# Altium PCB RELIA.PcbDoc (part 2 of 3)
Units mm, origin at the board's own origin, x right, y up, seen from the top; angles counter-clockwise.
Board outline 64.01 x 60 mm, 4 copper layers (Top Layer, GND, POWER, Bottom Layer), stack 1.457 mm thick; 143 components, 99 nets, 570 pads, 325 vias.
Unrouted connection lines stored in the file: 1.
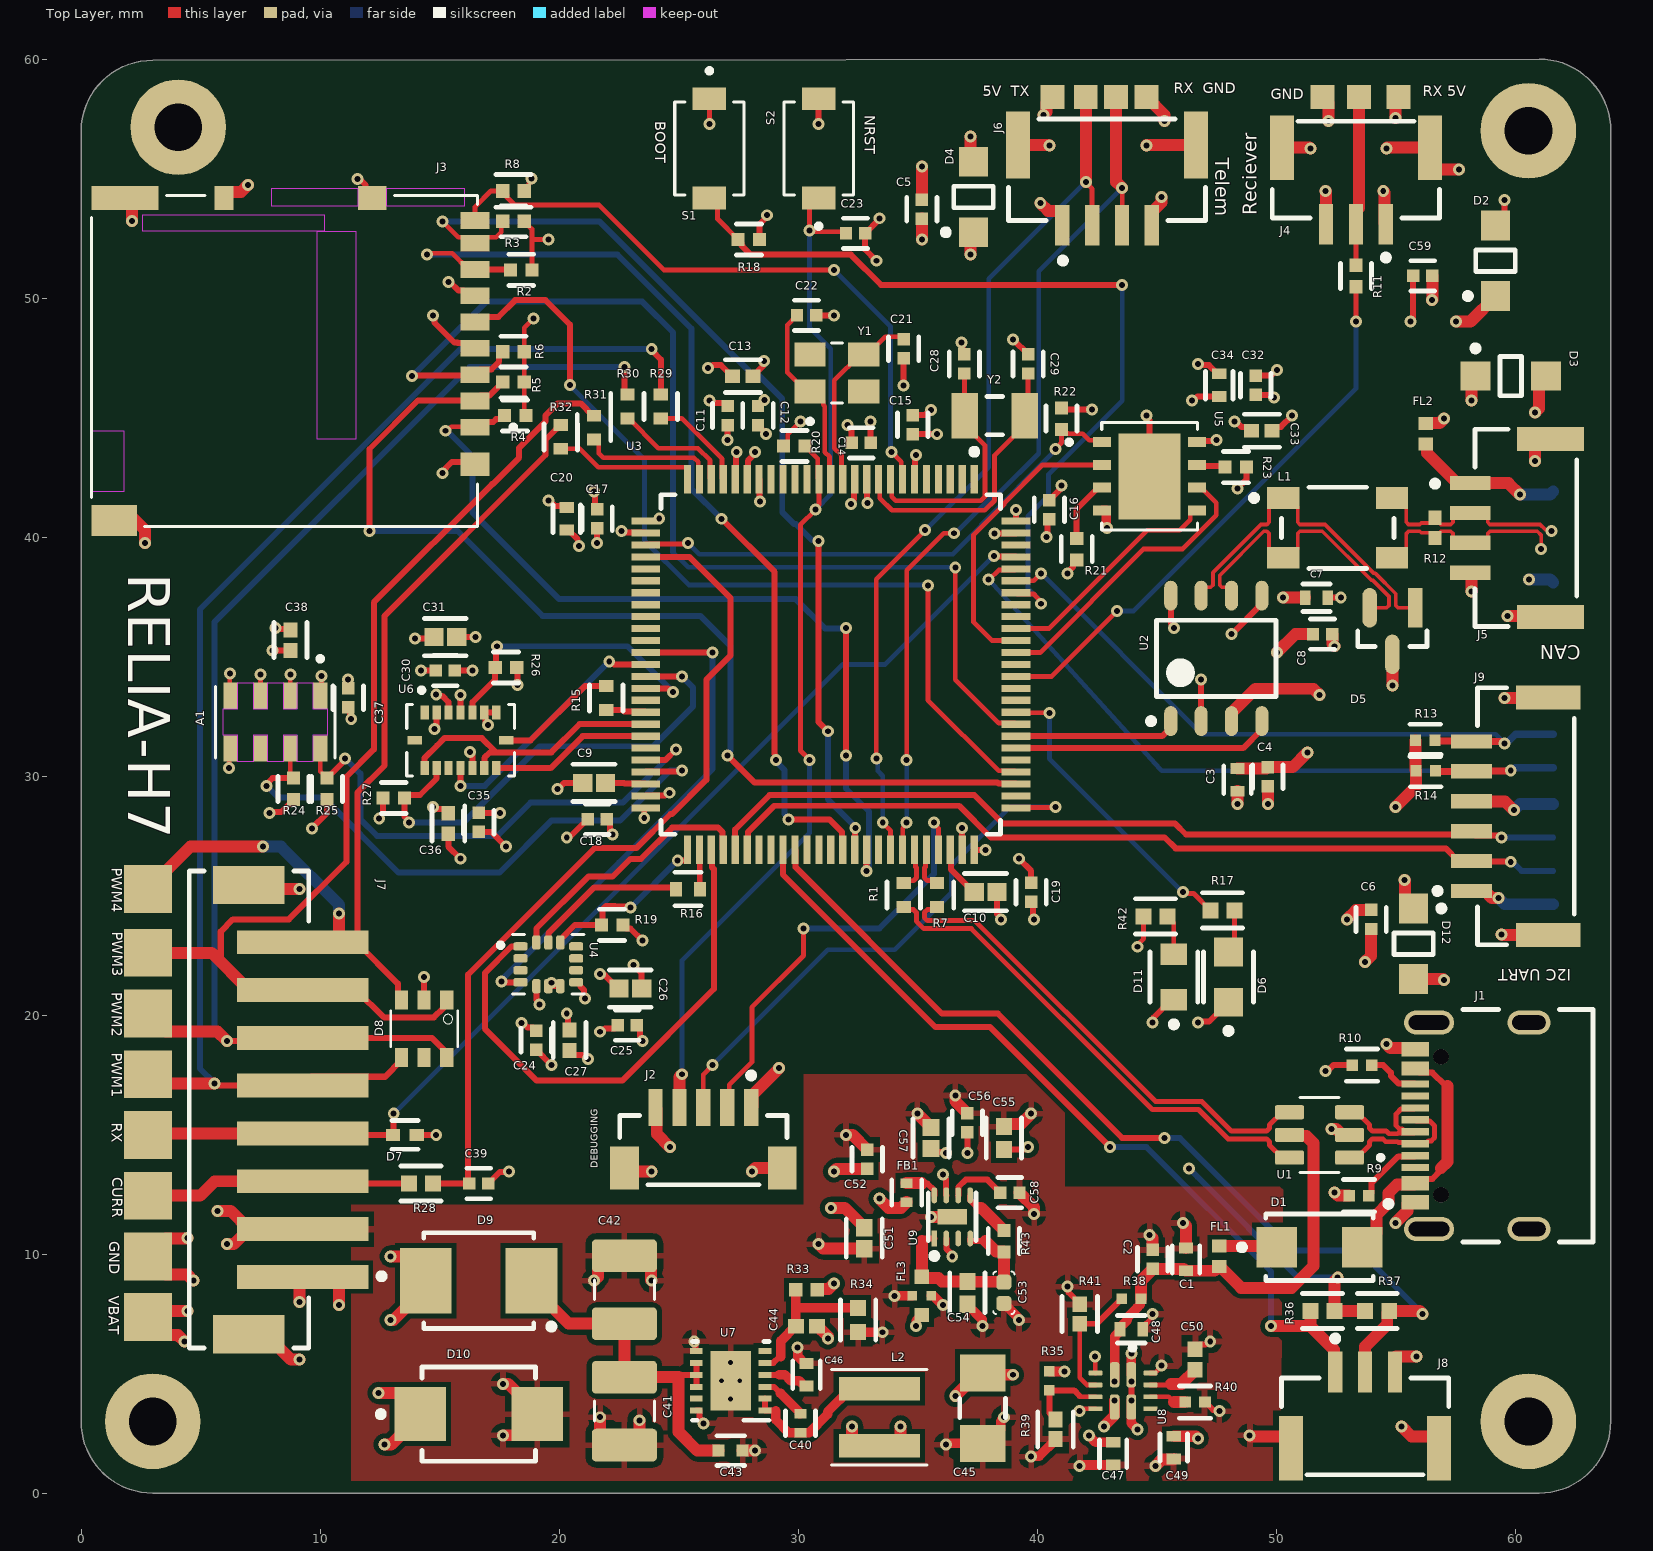
[diagram p0: Top Layer view]

## Part data (continued)
R35 R38: library part CMP-2002-00388-1, Manufacturer="Vishay Dale", Part Number=CRCW040223K7FKTD
R36 R37: library part CMP-250906-194630-1, "RES Thin Film,  4.7kΩ, 0.5%, 0.063W, 25ppm/°C, 0402"
R39 R41: library part CMP-02407-012302-1, "RES SMD 5K OHM 0.1% 1/20W 0402", Case Code (Imperial)=0402, Case Code (Metric)=1005, Max Operating Temperature=155°C, Max Power Dissipation=50mW, Min Operating Temperature=-55°C, Package Quantity=1000, Resistance=5kR, Resistor Type="Thin Film", Temperature Coefficient=25ppm/°C, Tolerance=0.1%, Case/Package=0402, Features="Moisture Resistant", Height=0.033inch, Length=0.042inch, Number of Terminations=2, Packaging="Tape and Reel", RoHS Compliant=Yes, Width=0.022inch
R40: library part CMP-04015-106274-1, "51.1kΩ ±1% 0.1W Chip Resistor 0402 Thick Film AEC-Q200 Qualified", Case Code (Imperial)=0402, Case Code (Metric)=1005, Max Operating Temperature=155°C, Min Operating Temperature=-55°C, Package Quantity=10000, Power Rating=63mW, Resistance=51.1kR, Resistor Type="Thick Film", Temperature Coefficient=100ppm/°C, Tolerance=1%, Voltage Rating=50V, Case/Package=0402, Construction=Rectangular, Depth=0.5mm, Height=0.35mm, Lead Free="Contains Lead", Length=1mm, Military Standard=Not, Packaging="Tape and Reel", RoHS Compliant=No, Series=RK73H, Termination=SMD/SMT, Voltage Rating (DC)=50V, Width=0.5mm
S1 S2: "Tactile Switch SPST-NO Top Actuated Surface Mount", Package=None, Availability=Unavailable, MP=TL1015AF160QG, Price=None
U1: "17V Clamp 5A (8/20Âµs) Ipp Tvs Diode Surface Mount SOT-23-6", Package="SOT-23-6 STMicroelectronics", Availability="In Stock", Check_prices=https://www.snapeda.com/parts/USBLC6-2SC6/STMicroelectronics/view-part/?ref=eda, MF=STMicroelectronics, MP=USBLC6-2SC6, Price=None, Purchase-URL=https://pricing.snapeda.com/search/part/USBLC6-2SC6/?ref=eda, SnapEDA_Link=https://www.snapeda.com/parts/USBLC6-2SC6/STMicroelectronics/view-part/?ref=snap
U2: library part CMP-2000-07245-1, "High-Speed CAN Transceiver, 3 to 5 V, 8-Pin SOIC (SOT96-1), RoHS, Tape and Reel", Manufacturer=NXP, Operating Supply Voltage (Max)=5.5V, Operating Supply Voltage (Min)=4.5V, Operating Supply Voltage (Typ)=5V, Operating Temperature (Max)=125C, Operating Temperature (Min)=-40C, Operating Temperature Classification=Automotive, Package Description="8-Pin Small Outline Integrated Circuit, Body 4.9 x 3.9 mm, Pitch 1.27 mm", Package Reference=SOT96-1, Package Type=SO, Power Down Mode=Normal/Silent, Supply Current=70mA, Category=Transceiver, Data Rate=1Mbps, Datasheet URL=http://www.nxp.com/documents/data_sheet/TJA1051.pdf, Datasheet Version="Rev. 7, 01/2015", DELETED=Compliant, Manufacturer URL=http://www.nxp.com/, Mounting=SurfaceMount, Mounting Technology=SurfaceMount, Number of Transceivers=1, Packaging=TapeandReel, Pin Count=8, Rad Hardened=No, Standard Supported=ISO11898-2
U3: library part CMP-12105-000050-1, "IC MCU 32BIT 2MB FLASH 100LQFP", Ambient Temperature Range High=+85°C, Ambient Temperature Range Low=-40°C, Frequency=480MHz, Manufacturer=STMicroelectronics, Max Junction Temp=+125°C, Max Supply Voltage=3.6V, Min Supply Voltage=1.71V, Package=LQFP100-1L, Temperature="-40°C to +125°C", Automotive=No, Category=IC, ComponentLink2Description=Datasheet, ComponentLink2URL=https://www.st.com/resource/en/datasheet/stm32h743vi.pdf, Core Architecture="Arm Cortex-M7", Data Bus Width=32bits, Device Class L1="Integrated Circuits (ICs)", Device Class L2="Embedded Processors and Controllers", Device Class L3=Microcontrollers, Digikey Description="IC MCU 32BIT 2MB FLASH 100LQFP", Height=1.6mm, Interface=I2C,SPI,UART,USART,USB,LIN,IrDA,Ethernet,I2S,Other, Ipc Land Pattern Name=QFP50P1600X1600X160-100, Lead Free=Yes, Manufacturer Part Number=STM32H743VIT6, Memory Size=2MBytes, Memory Type=FLASH, Number Of A/D Converters=3, Number Of Adc Channels=36, Number Of Cores=1, Number Of Ethernet Channels=1, Number Of I2C Channels=4, Number Of I/Os=82, Number Of Pwm Channels=42, Number Of Spi Channels=6, Number Of Timers/Counters=20, Number Of Uart Channels=9, Number Of Usb Channels=2, Octopart=https://octopart.com/stm32h743vit6-stmicroelectronics-76372527, Ram Size=1060KBytes, RoHS=TRUE, Standoff Height=0.05mm, Temperature Range High=+125°C, Temperature Range Low=-40°C
U4: "Accelerometer, Gyroscope, 6 Axis Sensor Output", Package=None, Availability=Unavailable, MP=ICM-42688-P, Price=None
U5: "FRAM (Ferroelectric RAM) Memory IC 256Kb (32K x 8) SPI 40 MHz 8-DFN (4x4.5)", Package="TDFN-8 Cypress Semiconductor", Check_prices=https://www.snapeda.com/parts/FM25V02A-DG/Infineon/view-part/?ref=eda, MF="Cypress Semiconductor", MP=FM25V02A-DG, SnapEDA_Link=https://www.snapeda.com/parts/FM25V02A-DG/Infineon/view-part/?ref=snap
U6: "High-performance 6-axis inertial sensor (accelerometer + gyroscope) <a href=\"https://pricing.snapeda.com/parts/BMI088/Bosch%20Sensortec/view-part?ref=eda\">Check prices</a>", Package=None, Availability=Unavailable, MP=BMI088, Price=None
U7: "SIMPLE SWITCHERÂ®, 36V 2.5A Synchronous Step-Down Converter 12-WSON -40 to 125", Manufacturer_Name="Texas Instruments", Copyright="Copyright (C) 2025 Ultra Librarian. All rights reserved.", Datasheet=https://www.ti.com/lit/gpn/lmr23625, Manufacturer_Part_Number=LMR23625CFPDRRR, RefDes=RefDes, TYPE=TYPE
U8: "2.7-V&nbsp;to 22-V, 56-mâ„", Package="VQFN-HR-12 Texas Instruments", Availability="In Stock", Check_prices=https://www.snapeda.com/parts/TPS2121RUXR/Texas+Instruments/view-part/?ref=eda, MF="Texas Instruments", MP=TPS2121RUXR, Price=None, Purchase-URL=https://pricing.snapeda.com/search?q=TPS2121RUXR&ref=eda, SnapEDA_Link=https://www.snapeda.com/parts/TPS2121RUXR/Texas+Instruments/view-part/?ref=snap
U9: library part CMP-06324-000082-1, "IC REG LINEAR 3.3V/3.3V 8TMLF", Dropout Voltage=120mV, Max Operating Temperature=125°C, Min Current Limit=350mA, Min Input Voltage=2.3V, Min Operating Temperature=-40°C, Output Current=300mA, Output Voltage=3.3V, Output Voltage Accuracy=1%, Package Quantity=1, Mount="Surface Mount", Number of Outputs=2, Number of Pins=8, Number of Regulators=2, Packaging="Tape and Reel", Polarity=Positive, RoHS Compliant=Yes, Series=-
Y1: library part SXT32412BB07-25.000MT, "25 MHz Â±30ppm Crystal 12pF 50 Ohms 4-SMD, No Lead", Package="NON STANDARD-4 Suntsu", Supplier Part Number 1=535-ABM8N-25.0000MHZ-12-B1U-T3CT-ND, Check_prices=https://www.snapeda.com/parts/SXT32412BB07-25.000M/Suntsu/view-part/?ref=eda, MF=Suntsu, MP=SXT32412BB07-25.000M, SnapEDA_Link=https://www.snapeda.com/parts/SXT32412BB07-25.000M/Suntsu/view-part/?ref=snap, Supplier 1=DigiKey
Y2: library part CMP-0447-00001-4, "Crystal 32.768kHz ±20ppm (Tol) 12.5pF FUND 70kΩ 2-Pin CSMD T/R", Case/Package=CSMD, ESR (Equivalent Series Resistance)=70kR, Frequency=32.768kHz, Frequency Tolerance=20ppm, Load Capacitance=12.5pF, Max Operating Temperature=85°C, Min Operating Temperature=-40°C, Operating Frequency="32.768 kHz", Package Quantity=3000, Depth=1.5mm, Height=0.9mm, Lead Free="Lead Free", Length=3.2mm, Number of Pins=2, Packaging="Tape and Reel", Radiation Hardening=No, REACH SVHC="No SVHC", RoHS Compliant=Yes, Series=ABS07, Series Resistance=70kR, Termination=SMD/SMT, Tolerance=20ppm, Width=1.5mm

## Free pads (board coordinates)
  round 4 / inner rect 2x2 / far side round 4 hole 2: MH4(3,3) MH4(4.064,57.15) MH4(60.556,3) MH4(60.556,57)
  rect 2x2 smd: MH5(2.794,22.606) MH5(2.794,25.273) MH6(2.794,20.066) MH7(2.794,17.526) MH8(2.794,14.986) MH9(2.794,12.446) MH10(2.794,9.906) MH11(2.794,7.366)
  rect 1x1 smd: MH12(40.64,58.42) MH13(42.037,58.42) MH14(43.307,58.42) MH15(44.577,58.42) MH15(51.943,58.42) MH15(53.467,58.42) MH15(55.118,58.42)
  rect 1x1 smd far side: MH15(61.595,24.638) MH15(61.595,26.035) MH15(61.595,27.432) MH15(61.595,28.829) MH15(61.595,30.353) MH15(61.595,31.75) MH15(61.595,38.1) MH15(61.595,39.37) MH15(61.595,40.64) MH15(61.595,41.91)

## Via types
v1: diameter 0.5, hole 0.25, Top Layer to Bottom Layer, tented both sides, 323 vias
v2: diameter 0.5, hole 0.25, Top Layer to Bottom Layer, 2 vias

## Nets (pads, with @x,y where several pads share a name; then routed paths per layer and width w, separated by ;. In a path a pad name is that pad's centre, name@x,y a point inside that pad or via, vN(x,y) a via of type N, cw(c..) or ccw(c..) an arc to the next point about the centre after c; other vN are vias at no path point)
+3V3_ANALOG: A1.1 A1.2 C11.1 C12.1 C13.1 C24.1 C25.1 C26.1 C27.1 C30.1 C31.1 C35.1 C36.1 C37.1 C38.1 C51.1 C52.1 FB1.2 R19.2 R24.1 R25.1 R26.2 R27.2 U3.20 U3.21 U4.5 U4.8 U6.3 U6.11 | length 27.6
  Top Layer w0.2: A1.2@8.753,33.358 v1(8.753,34.243) ; A1.1@10.003,33.358 10.059,33.414 v1(10.059,34.183)
  Top Layer w0.25: v1(7.874,28.448) 7.922,28.496 8.372,28.496 R24.1@8.89,29.014 ; v1(8.001,35.258) C38.1@8.763,35.258 ; v1(9.652,27.813) 10.287,28.448 R25.1@10.287,29.014 ; C37.1@11.176,32.874 11.255,32.795 11.255,32.433 v1(11.303,32.385) ; v1(12.474,28.218) 12.474,28.286 12.631,28.442 R27.2@12.631,29.083 ; v1(14.732,28.702) 14.8,28.702 14.871,28.631 15.206,28.631 15.367,28.469 C36.1@15.367,28.448 ; v1(14.859,33.406) 14.907,33.358 15.107,33.358 15.375,33.091 U6.3@15.375,32.661 ; C30.1@15.64,34.417 v1(16.383,34.417) ; C31.1@15.717,35.814 v1(16.51,35.814) ; v1(16.281,31.012) 16.281,30.945 16.375,30.851 U6.11@16.375,30.331 ; C35.1@16.637,28.467 16.646,28.457 17.517,28.457 v1(17.526,28.448) ; R26.2@18.23,34.544 18.259,34.515 v1(18.259,33.811) ; v1(18.421,19.679) 18.489,19.679 18.684,19.484 18.907,19.484 C24.1@19.042,19.349 ; U4.5@19.05,21.209 19.05,20.642 19.183,20.509 v1(19.183,20.441) ; v1(20.32,20.066) 20.368,20.018 20.368,19.449 C27.1@20.439,19.378 ; U4.8@20.715,21.374 20.835,21.374 20.885,21.324 20.885,21.204 21.034,21.055 21.034,20.749 v1(21.082,20.701) ; v1(21.717,19.304) 21.785,19.304 21.93,19.449 22.317,19.449 C25.1@22.452,19.584 ; v1(21.717,21.717) 21.765,21.669 21.918,21.669 22.479,21.108 C26.1@22.502,21.108 ; R19.2@22.667,23.775 22.817,23.625 22.984,23.625 v1(23.495,23.114) ; v1(27.051,44.069) C11.1@27.051,44.685 ; U3.21@27.369,42.421 27.394,42.446 27.394,43.523 v1(27.432,43.561) ; U3.20@27.869,42.421 27.894,42.446 27.894,43.193 28.194,43.493 v1(28.194,43.561) ; C13.1@28.127,46.749 28.149,46.749 28.297,46.897 28.297,46.919 28.527,47.149 28.527,47.345 v1@28.554,47.371 ; C12.1@28.321,44.685 28.654,44.352 v1(28.654,44.323)
  Top Layer w0.5: v1(31.369,11.938) 31.946,11.938 32.766,11.118 C51.1@32.766,11.107 ; v1(31.496,13.462) 31.604,13.57 C52.1@32.893,13.57 ; v1(33.401,12.319) 33.782,11.938 34.309,11.938 FB1.2@34.544,12.173
  other v1: 28.575,47.371
+3V3_MAIN: C7.1 C8.1 C14.1 C15.1 C16.1 C17.1 C18.1 C19.1 C20.1 C32.1 C33.1 C34.1 C55.1 C56.1 C57.1 J2.1 J3.4 R2.1 R3.1 R4.1 R5.1 R6.1 R8.2 R20.1 R21.2 R22.2 R23.2 R36.2 R37.2 R42.2 S1.1 U2.5 U3.6 U3.11 U3.27 U3.50 U3.75 U3.100 U5.8 U9.7 | length 52.8
  Top Layer w0.2: R4.1@18.542,45.212 R5.1@18.542,46.482 R6.1@18.542,47.752 18.542,48.752 18.923,49.133 v1(18.923,49.149) ; R3.1@18.542,53.213 18.865,52.89 18.865,52.451 ; R8.2@18.542,54.483 18.726,54.667 18.726,54.791 18.852,54.916 v1(18.852,54.997) ; R2.1@18.865,51.181 18.865,52.451 ; v2(19.558,52.451) 18.865,52.451 ; v1(26.289,57.277) S1.1@26.289,58.336 ; R20.1@29.395,43.815 29.57,43.99 29.57,44.302 v1(30.099,44.831) ; v1(44.196,22.86) 44.196,22.941 44.454,23.2 R42.2@44.454,24.13
  Top Layer w0.25: v1(14.732,49.276) 14.78,49.228 14.78,48.979 15.626,48.133 15.748,48.133 15.76,48.121 16.259,48.121 J3.4@16.484,47.896 ; C20.1@20.32,40.292 20.395,40.292 20.78,39.907 20.78,39.672 v1(20.828,39.624) ; v1(21.59,39.751) C17.1@21.59,40.367 ; C18.1@21.99,28.194 22.125,28.059 22.125,27.727 22.225,27.627 v1(22.225,27.559) ; v1(22.606,40.259) 22.674,40.259 22.737,40.196 23.594,40.196 U3.27@23.619,40.171 ; v1(23.563,28.253) 23.563,28.646 23.588,28.671 U3.50@23.619,28.671 ; v1(32.065,44.696) 32.065,44.628 32.239,44.454 C14.1@32.239,43.942 ; v1(32.212,41.39) 32.212,41.458 32.344,41.59 32.344,42.396 U3.11@32.369,42.421 ; C15.1@34.798,44.304 v1(35.814,44.304) ; U3.6@34.869,42.421 34.894,42.446 34.894,43.403 v1(34.925,43.434) ; C57.1@35.56,14.42 35.708,14.272 36.147,14.272 v1(36.195,14.224) ; v1(36.068,13.335) 36.068,13.267 36.195,13.14 36.195,12.463 U9.7@36.199,12.459 ; v1(37.084,14.224) C56.1@37.084,15.094 ; U3.75@37.369,26.921 37.385,26.905 v1(37.838,26.905) ; C55.1@38.608,14.38 39.459,14.38 39.556,14.478 v1(39.624,14.478) ; U3.100@39.119,40.671 39.124,40.676 v1(39.124,41.14) ; v1(39.243,26.543) 39.751,26.035 C19.1@39.751,25.546 ; v1(40.386,40.005) 40.434,40.053 40.434,40.669 C16.1@40.513,40.748 ; R22.2@41.021,45.408 41.09,45.339 v1(42.291,45.339) ; v1(41.275,38.481) 41.275,38.521 41.506,38.752 41.506,38.897 R21.2@41.656,39.047 ; v1(46.482,45.72) 46.55,45.72 46.71,45.88 C34.1@47.625,45.88 ; U5.8@46.689,43.97 46.74,44.021 47.45,44.021 v1(47.498,44.069) ; v1(48.133,35.941) 48.138,35.941 49.403,37.206 U2.5@49.403,37.55 ; v1(48.26,44.831) 48.328,44.831 48.547,44.611 48.813,44.611 C33.1@48.974,44.45 ; v1(48.387,42.037) 48.768,42.418 R23.2@48.768,42.926 ; C32.1@49.149,45.955 49.735,45.955 49.843,45.847 v1(49.911,45.847)
  Top Layer w0.5: J2.1@28.035,16.126 28.085,16.176 28.085,16.651 29.21,17.776 v1(29.21,17.78) ; v1(50.038,35.179) 50.8,35.941 C8.1@51.543,35.941 ; v1(50.292,37.465) C7.1@51.214,37.465 ; v1(52.578,9.017) 52.447,8.886 R36.2@52.447,7.62 R37.2@53.725,7.62
  Bottom Layer w0.25: v1(46.355,13.589) 46.71,13.234 50.927,9.017 v1(52.578,9.017)
BEC_5V: C44.2 C45.1 C47.1 L2.2 R33.2 R35.2 U8.7 U8.7_1 | length 10.8
  Top Layer w0.4: R35.2@40.513,5.099 40.522,5.09 41.138,5.09 v1(41.148,5.08) ; v1(42.164,2.413) 42.451,2.126 C47.1@43.18,2.126
  Top Layer w0.45: v1(42.799,2.794) 42.799,2.808 43.242,3.251 U8.7_1@43.242,3.878
  Top Layer w0.5: C44.2@30.793,6.985 30.813,6.985 31.242,6.556 v1(31.242,6.477) ; R33.2@30.803,8.509 30.828,8.534 31.267,8.534 v1(31.496,8.763) ; v1(32.258,2.794) 32.258,2.23 32.498,1.99 L2.2@33.401,1.99 34.05,1.99 34.29,2.23 v1(34.29,2.794) ; v1(36.576,4.064) 37.543,5.032 C45.1@37.719,5.032 37.798,4.953 v1(38.989,4.953)
BMI_CSB1: R27.1 U3.39 U6.14 | length 20.1
  Top Layer w0.25: v1(13.716,28.067) 13.716,28.135 13.531,28.32 R27.1@13.531,29.083 13.655,29.207 14.181,29.207 14.875,29.901 U6.14@14.875,30.331 ; U3.39@23.619,34.171 23.623,34.167 25.142,34.167 v1(25.146,34.163)
  Bottom Layer w0.25: v1(13.716,28.067) 16.003,28.067 19.186,31.25 23.935,31.25 25.594,32.909 25.594,33.715 v1(25.146,34.163)
BMI_CSB2: R26.1 U3.40 U6.5 | length 12.6
  Top Layer w0.25: U6.5@16.375,32.661 16.375,33.091 17.325,34.04 17.325,34.539 17.365,34.579 17.365,35.399 v1(17.399,35.433) ; U3.40@23.619,33.671 24.554,33.671 24.697,33.528 v1(24.765,33.528)
  Bottom Layer w0.25: v1(17.399,35.433) 22.86,35.433 v1(24.765,33.528)
BMI_INT(GYRO): U3.38 U6.12 | length 10.7
  Top Layer w0.25: v1(15.875,29.591) U6.12@15.875,30.331 ; v1(22.098,34.798) 22.166,34.798 22.293,34.671 U3.38@23.619,34.671
  Bottom Layer w0.25: v1(15.875,29.591) 16.891,29.591 v1(22.098,34.798)
CAN1_N: D5.2 L1.2 U2.6 | length 13.1
  Top Layer w0.154: U2.6@48.133,37.55 48.133,37.721 47.95,37.904 47.729,37.904 47.639,37.994 47.639,38.397 49.487,40.245 49.615,40.245 49.705,40.155 49.705,39.509 50.078,39.136 L1.2@50.303,39.136 50.528,39.136 50.901,39.509 50.901,40.155 50.991,40.245 51.932,40.245 53.977,38.201 54.037,38.201 54.723,37.514 54.723,37.134 54.633,37.043 D5.2@53.914,37.043

## Text inside footprints (layer, text, board x,y; h text height)
J3: Mechanical 13 "PCB Edge" at -0.611,49.739 h0.6 r270